# Altium PCB Copy of PCB1.PcbDoc
Units mil, origin at the board's own origin, x right, y up, seen from the top; angles counter-clockwise.
Board outline 3946.22 x 3225 mil, 2 copper layers (Top Layer, Bottom Layer); 36 components, 42 nets, 162 pads, 10 vias.
Unrouted connection lines stored in the file: 1.
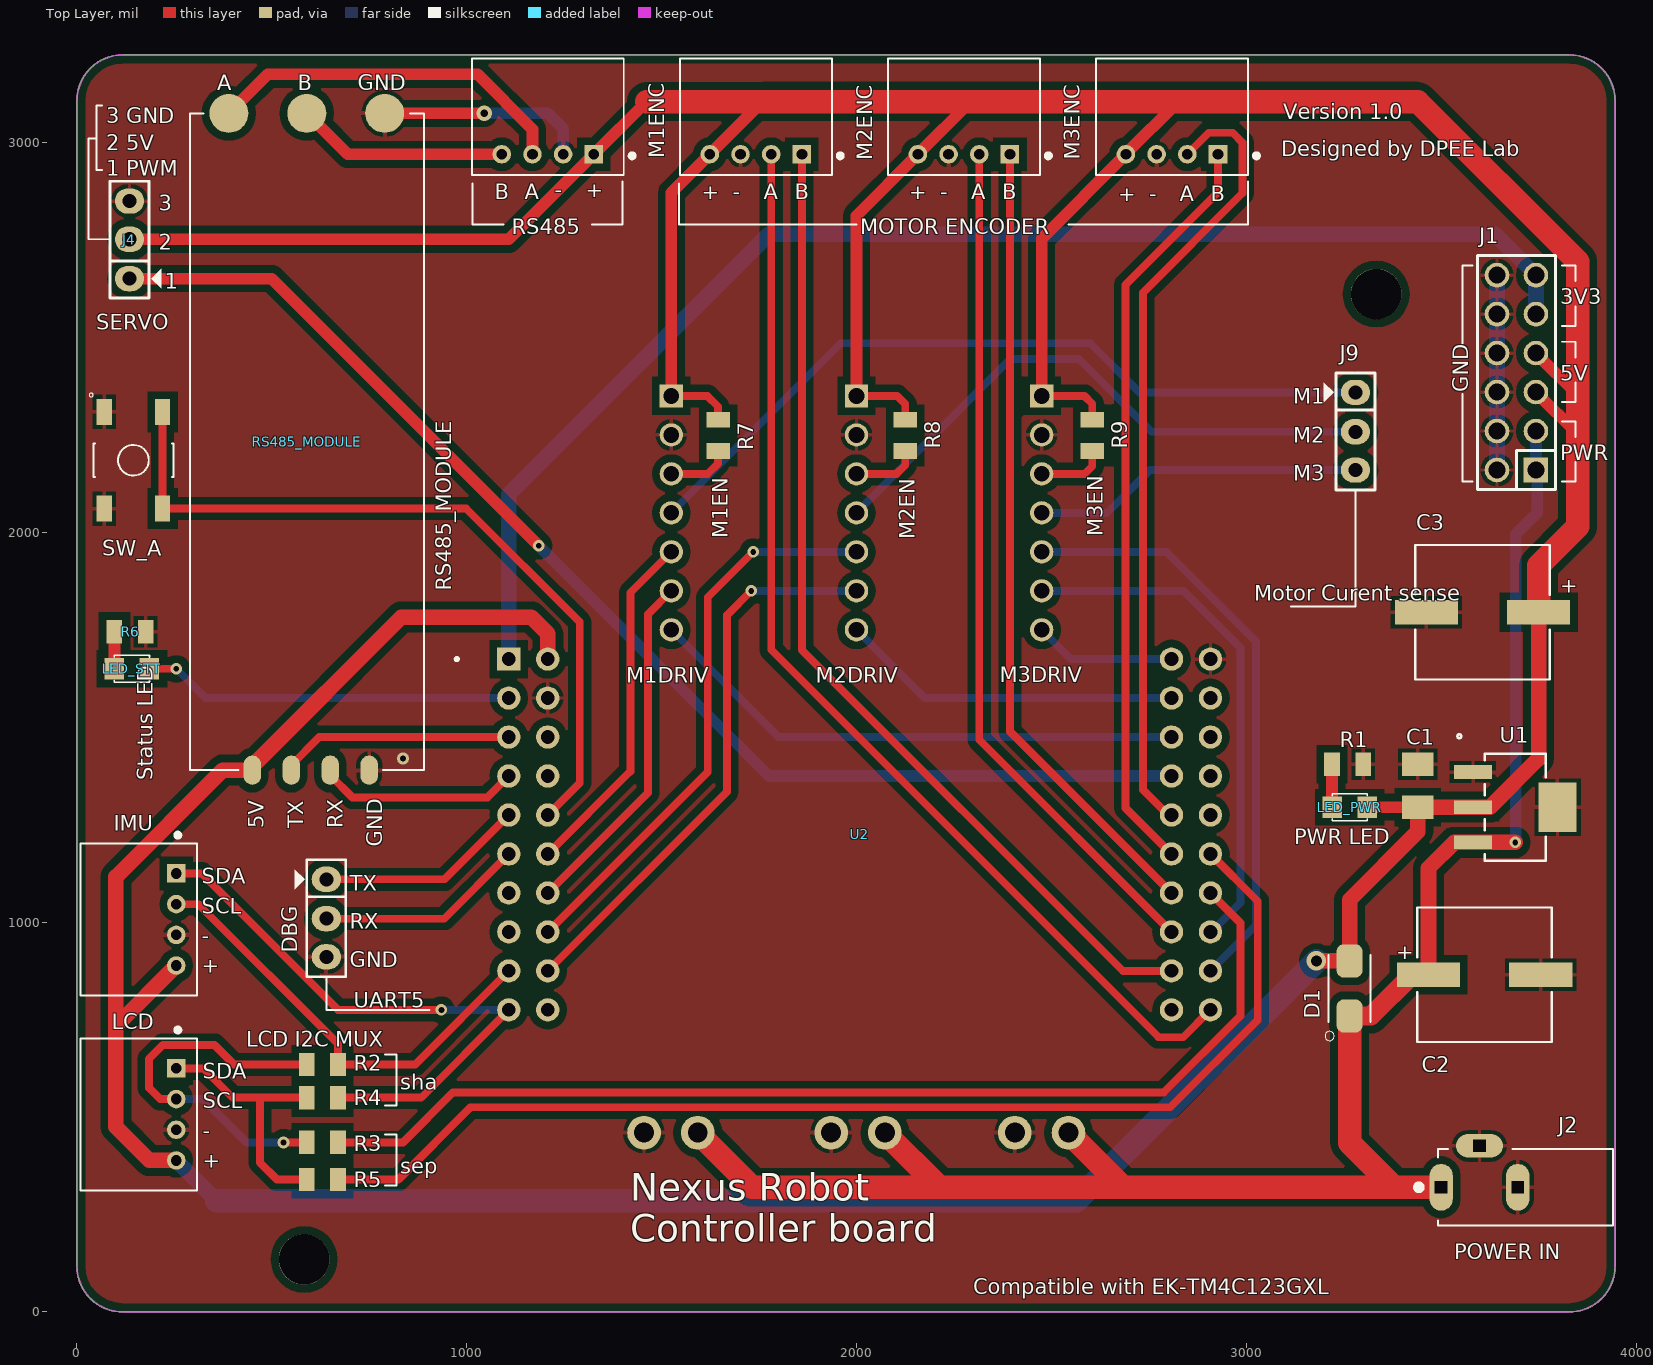
[diagram p0: Top Layer view]
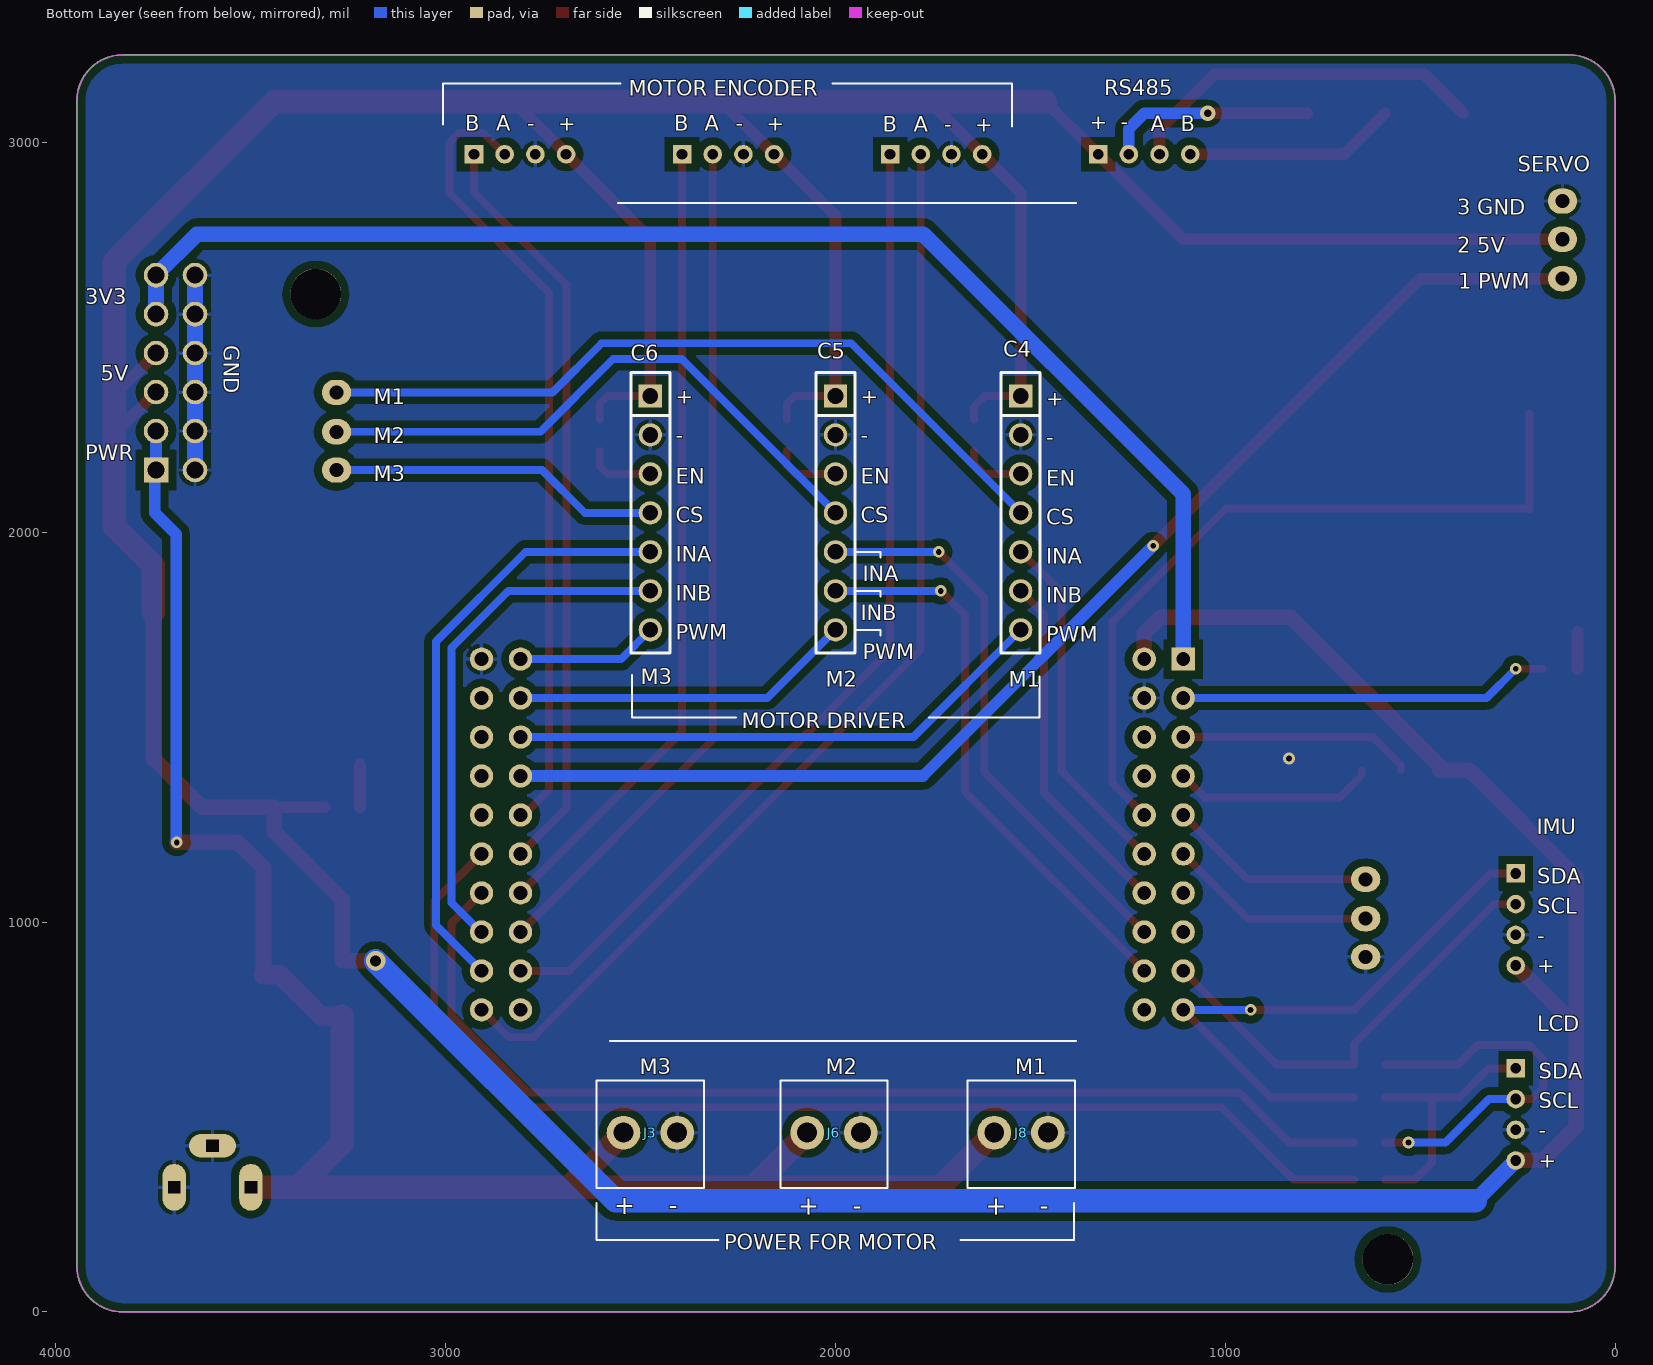
[diagram p1: Bottom Layer view, seen from below]

## Layer stack, top to bottom
Top Solder: solder mask 0.4, Solder Resist, Dk 3.5
Top Layer: signal copper 1.4
Dielectric 1: dielectric 12.6, FR-4, Dk 4.8
Bottom Layer: signal copper 1.4
Bottom Solder: solder mask 0.4, Solder Resist, Dk 3.5

## Board outline
118.11,0 cw(c118.11,118.11) 0,118.11 0,3106.89 cw(c118.11,3106.89) 118.11,3225 3828.11,3225 cw(c3828.11,3106.89) 3946.22,3106.89 3946.22,118.11 cw(c3828.11,118.11) 3828.11,0

## Design rules (kind name [scope] priority, off if disabled: settings)
Clearance Clearance_Poly [InPolygon] p1: gap=20 ignorepadtopadclearanceinfootprint=FALSE
Clearance [All] p2: gap=8 ignorepadtopadclearanceinfootprint=FALSE
ComponentClearance ComponentClearance_1 [InComponent('u2') vs InComponent('c*', 'j*','r*')] p1: gap=0 collisioncheckmode=3 verticalgap=0 showdistances=FALSE
ComponentClearance [All] p2: gap=10 collisioncheckmode=3 verticalgap=0 showdistances=FALSE
MinimumSolderMaskSliver [All] p1: minsoldermaskwidth=7
PolygonConnect [All] p1: connectstyle=Relief reliefconductorwidth=10 reliefentries=4 polygonreliefangle="90 Angle" airgapwidth=10
RoutingVias [All] p1: holewidth=28 width=50 viastyle="Through Hole" minholewidth=10 minwidth=20 maxholewidth=15 maxwidth=30
SilkToSilkClearance [All] p1: silktosilkclearance=5
SilkToSolderMaskClearance [IsPad] p1: minsilkscreentomaskgap=5 clearancetoexposedcopper=TRUE
SolderMaskExpansion [All] p1: expansion=4
Width [All] p1: maxlimit=60 minlimit=10 preferedwidth=20
26 further rules are at their usual default settings.

## Components (designator, comment, footprint, x,y, rotation, side; value= is the part's Value field where it differs from the comment)
C1 "0.1u" SMD-1206C 3440,1350 r180 top value=0.10µF
C2 "10u" CAP_EEFK_F_PAN-M 3611.5,865 r0 top
C3 "10u" CAP_EEFK_F_PAN-M 3606,1795 r180 top
C4 "JP7" JP7-C1T 1525,2350 r270 bottom locked
C5 "JP7" JP7-C1T 2000,2350 r270 bottom locked
C6 "JP7" JP7-C1T 2475,2350 r270 bottom locked
D1 "EGF1B" DIOM449X264X300L114X135N 3265,830 r90 top
DBG "Jumper 3" JP3 640,1010 r270 top value=J3
IMU "S4B-PH-K-S(LF)(SN)" JST_S4B-PH-K-S(LF)(SN) 255,1006.89 r270 top
J1 "JP6x2" JP6-D2T 3693.11,2410 r90 top
J2 "POWER IN" CUI_PJ-031C 3499.76,320 r0 top
J3 "M3" KF2-3.5 2475,460 r180 bottom locked
J4 "SERVO" JP3 135,2751 r90 top value=J3
J6 "M2" KF2-3.5 2003.9,460 r180 bottom locked
J8 "M1" KF2-3.5 1523.9,460 r180 bottom locked
J9 "Jumper 3" JP3 3280,2259 r270 top value=J3
LCD "S4B-PH-K-S(LF)(SN)" JST_S4B-PH-K-S(LF)(SN) 255,506.89 r270 top
LED_PWR "PWR LED" LED-0805-Green 3310,1295 r180 top value="LED 3 - 5 ly 2 Colour"
LED_STT "LED" LED-0805-Green 186.31,1650.26 r180 top value="LED 3 - 5 ly 2 Colour"
M1ENC "S4B-PH-K-S(LF)(SN)" JST_S4B-PH-K-S(LF)(SN) 1741.86,2970 r180 top
M2ENC "S4B-PH-K-S(LF)(SN)" JST_S4B-PH-K-S(LF)(SN) 2275.62,2970 r180 top
M3ENC "S4B-PH-K-S(LF)(SN)" JST_S4B-PH-K-S(LF)(SN) 2809.37,2970 r180 top
R1 "1k" SMD-0805-RES 3260,1405 r270 top value=0.2
R2 "0R" SMD-0805-RES 630,635 r90 top value=0.2
R3 "0R" SMD-0805-RES 630,435 r90 top value=0.2
R4 "0R" SMD-0805-RES 630,550 r90 top value=0.2
R5 "0R" SMD-0805-RES 630,340 r90 top value=0.2
R6 "1k" SMD-0805-RES 136.31,1745 r270 top value=0.2
R7 "1k" SMD-0805-RES 1645,2248.89 r0 top value=0.2
R8 "1k" SMD-0805-RES 2125,2248.89 r0 top value=0.2
R9 "1k" SMD-0805-RES 2605,2248.89 r0 top value=0.2
RS485 "S4B-PH-K-S(LF)(SN)" JST_S4B-PH-K-S(LF)(SN) 1208.11,2970 r180 top
RS485_MODULE "RS485_MODULE" RS485_MODULE 450,1389.96 r90 top
SW_A "TL3342F160QG" SW_TL3342F160QG 145,2185 r270 top
U1 "AMS1117" SOT_AMS_ADS 3690,1295 r270 top
U2 "EK-TM4C123GXL" MODULE_EK-TM4C123GXL 2008.11,1575 r0 top locked

## Footprints (in the part's own frame and the unit in brackets; to place one, negate y for a bottom-side part, rotate by r counter-clockwise, add the part's x,y. Pads: shape width x height; smd on the part's side, far side on the other; paste and mask are expansions set on the pad)
CAP_EEFK_F_PAN-M [mil]
  rect 162x63 smd paste+0 mask+0: 1(-144,0) 2(144,0)
  silkscreen extent -172,-172 172,172, body extent 0,0 10,10, height 10
CUI_PJ-031C [mil]
  oval 60x120 hole 31.5 square: 1(0,0) 2(196.85,0)
  oval 120x60 hole 31.5 square: 3(98.43,106.3)
  silkscreen extent -65,-98 441,98, body extent -13,-103 443,110, height 291
DIOM449X264X300L114X135N [mm]
  rrect54% 2.17x1.69 smd: A(1.795,0) C(-1.795,0)
  silkscreen extent -3.4,-1.36 2.19,1.6, body extent -2.6,-1.36 2.6,1.36, height 2.65
JP3 [mil] "Jumper 3"
  oval 65x75 hole 36: 1(-100,0) 2(1,0) 3(99,0)
  silkscreen extent -150,-81 150,50, body extent -150,-60 150,55, height 355
JP6-D2T [mm] "12 pins, dual pin, straight, gold plating"
  rect 1.6x1.6 hole 1.1: 1(-6.35,-1.27)
  round 1.6 hole 1.1: 2(-3.81,-1.27) 3(-1.27,-1.27) 4(1.27,-1.27) 5(3.81,-1.27) 6(6.35,-1.27) 7(6.35,1.27) 8(3.81,1.27) 9(1.27,1.27) 10(-1.27,1.27) 11(-3.81,1.27) 12(-6.35,1.27)
  silkscreen extent -7.62,-2.54 7.62,2.54, body extent -7.62,-2.54 7.62,2.54, height 8.55
JP7-C1T [mm] "7 row, straight, gold plating"
  rect 1.52x1.52 hole 1.02: 1(0,0)
  round 1.52 hole 1.02: 2(2.54,0) 3(5.08,0) 4(7.62,0) 5(10.16,0) 6(12.7,0) 7(15.24,0)
  silkscreen extent -1.52,-1.27 16.76,1.27, body extent -1.52,-1.25 16.76,1.25, height 8.51
JST_S4B-PH-K-S(LF)(SN) [mm]
  rect 1.208x1.208 hole 0.7: 1(-3,0)
  round 1.208 hole 0.7: 2(-1,0) 3(1,0) 4(3,0)
  silkscreen extent -5.64,-6.25 4.95,1.35, body extent -4.95,-6.22 4.95,1.38, height 4.8
KF2-3.5 [mm] "3,50mm - modular - blue - Horizontal wire entry - Pressure clamp - 8,4mm height - 02p"
  round 2.2 hole 1.3: 1(-1.75,0) 2(1.75,0)
  silkscreen extent -3.5,-3.6 3.5,3.4, body extent -3.95,-3.6 4.05,3.4, height 8.41
LED-0805-Green [mil]
  rect 50x55 smd: 1(0,0) 2(90,0)
  silkscreen extent 0,-35 90,35, body extent 5,-25 85,25, height 43
MODULE_EK-TM4C123GXL [mm]
  rect 1.52x1.52 hole 0.89: J1_1(-22.86,2.54)
  round 1.52 hole 0.89: J1_2(-22.86,0) J1_3(-22.86,-2.54) J1_4(-22.86,-5.08) J1_5(-22.86,-7.62) J1_6(-22.86,-10.16) J1_7(-22.86,-12.7) J1_8(-22.86,-15.24) J1_9(-22.86,-17.78) J1_10(-22.86,-20.32) J2_1(22.86,2.54) J2_2(22.86,0) J2_3(22.86,-2.54) J2_4(22.86,-5.08) J2_5(22.86,-7.62) J2_6(22.86,-10.16) J2_7(22.86,-12.7) J2_8(22.86,-15.24) J2_9(22.86,-17.78) J2_10(22.86,-20.32) J3_1(-20.32,2.54) J3_2(-20.32,0) J3_3(-20.32,-2.54) J3_4(-20.32,-5.08) J3_5(-20.32,-7.62) J3_6(-20.32,-10.16) J3_7(-20.32,-12.7) J3_8(-20.32,-15.24) J3_9(-20.32,-17.78) J3_10(-20.32,-20.32) J4_1(20.32,2.54) J4_2(20.32,0) J4_3(20.32,-2.54) J4_4(20.32,-5.08) J4_5(20.32,-7.62) J4_6(20.32,-10.16) J4_7(20.32,-12.7) J4_8(20.32,-15.24) J4_9(20.32,-17.78) J4_10(20.32,-20.32)
  silkscreen extent -26.35,2.44 -26.15,2.64
RS485_MODULE [mm]
  oval 1.905x1.143 smd: 1(0,0) 2(0,-2.54) 3(0,-5.08) 4(0,-7.62)
  round 2.54 smd: 5(42.8,1.53) 6(42.8,-3.55) 7(42.8,-8.63)
  silkscreen extent 0,-11.18 42.8,4.05, body extent 0,-11.18 42.8,4.06, height 1.4
SMD-0805-RES [mil]
  rect 60x40 smd: 1(0,40) 2(0,-40)
  body extent -24,-39 26,39, height 31
SMD-1206C [mil]
  rect 80x60 smd: 1(0,55) 2(0,-55)
  body extent -31,-63 32,63, height 39
SOT_AMS_ADS [mil]
  rect 35x98 smd paste+0 mask+0: 1(-90.16,-108.5) 2(0,-108.5) 3(90.16,-108.5)
  rect 126x98 smd paste+0 mask+0: 4(0,108.5)
  silkscreen extent -187,-148 137,78, body extent -132,-143 132,144, height 71
SW_TL3342F160QG [mm]
  rect 1.7x1 smd: 1(-3.15,-1.9) 2(3.15,-1.9) 3(-3.15,1.9) 4(3.15,1.9)
  silkscreen extent -4.38,-2.88 1.1,2.6, body extent -3.3,-2.5 3.3,2.5, height 1.46

## Part data
C1: library part "Cap SMD 1206", "CAP SMD 1206", Digi-Key Part Number=490-4495-1-ND, Manufacturer="Murata Electronics North America", Operating Temperature="-55°C ~ 125°C", Package / Case="1206 (3216 Metric)", Part Number=LLM315R71C104MA11L, Ratings=-, Temperature Coefficient=X7R, Tolerance=±20%, Voltage=16V, @ qty=0, Applications="Bypass, Decoupling", Datasheets=http://www.murata.com/~/media/webrenewal/support/library/catalog/products/capacitor/mlcc/c02e.pdf, Factory Stock=0, Features="Low ESL (Multi-Terminal)", Height - Seated (Max)=-, Image=//media.digikey.com/Renders/Murata%20Renders/1206(LLM315).jpg, Lead Spacing=-, Lead Style=-, Minimum Quantity=1, Mounting Type="Surface Mount, MLCC", Packaging="Cut Tape (CT)", Part Status=Active, Quantity Available=2915, Series=LLM, Size / Dimension="0.126\" L x 0.063\" W (3.20mm x 1.60mm)", Thickness (Max)="0.022\" (0.55mm)", Unit Price (USD)=0.9
C2 C3: library part CAP_ALU_8mm, "No Description Available", Manufacturer_Part_Number=EEEFP1H101AP, Built_By=EMA_UL_Team, Copyright="Copyright (C) 2018 Accelerated Designs. All rights reserved", RefDes=RefDes, SourceLibrary=Panasonic_2012-04-02a, Type=DEV, Vendor=Panasonic
C4 C5 C6: library part JP7_1, "WR-PHD 2.54 mm Angled Socket Header", Manufacturer="W¨¹rth Elektronik eiSos GmbH", partNo=613007143121, ComponentLink1 Description=Manufacturer, ComponentLink1URL=http://www.we-online.com, ComponentLink2 Description=Datasheet, ComponentLink2URL=http://katalog.we-online.de/em/datasheet/6130xx143121.pdf, Created by="Karrer Zheng", Created Date="29 March 2013", NoPins=07
D1: "SS54 SMA / Diode Shotky SS54 1N5824 5A 40V", Package="DO-214AC-214 ON Semiconductor", Availability=Unavailable, MF="ON Semiconductor", MP=EGF1B, Price=None, SnapEDA_Link=https://www.snapeda.com/parts/EGF1B/ON%20Semiconductor/view-part/1790489/?ref=snap
DBG J4 J9: library part JP3
IMU LCD M1ENC M2ENC M3ENC RS485: "Connector Header Through Hole, Right Angle 4 position 0.079 _2.00mm_", Package=None, Availability=Unavailable, MF="JST Sales", MP=S4B-PH-K-S_LF__SN_, Price=None, SnapEDA_Link=https://www.snapeda.com/parts/S4B-PH-K-S%28LF%29%28SN%29/JST%20Sales%20America%20Inc./view-part/591324/?ref=snap
J1: "WR-PHD 2.54 mm Dual Socket Header", Manufacturer="W¨¹rth Elektronik eiSos GmbH", partNo=61301221821, ComponentLink1 Description=Manufacturer, ComponentLink1URL=http://www.we-online.com, ComponentLink2 Description=Datasheet, ComponentLink2URL=http://katalog.we-online.de/em/datasheet/6130xx21821.pdf, Created by="Karrer Zheng", Created Date="29 March 2013", NoPins=12
J2: library part PJ-031C, "1.0 x 4.2 mm, 2.0 A, Horizontal, Through Hole, Dc Power Jack Connector", Package=None, Availability=Unavailable, MF="CUI Devices", MP=PJ-031C, Price=None, SnapEDA_Link=https://www.snapeda.com/parts/PJ-031C/CUI%20Devices/view-part/699414/?ref=snap
J3 J6 J8: library part KF2, Manufacturer="Würth Elektronik eiSos GmbH", partNo=691103110002, ComponentLink1 Description=Manufacturer, ComponentLink1URL=http://www.we-online.com, ComponentLink2 Description=Datasheet, ComponentLink2URL=http://katalog.we-online.de/em/datasheet/6911031100xx.pdf, Created by="Karrer Zheng", Created Date="29 October 2013", NoPins=2
LED_PWR LED_STT: library part "LED SMD"
R1 R2 R3 R4 R5 R6 R7 R8 R9: library part "Res SMD 0805", "RES SMD 0805", Digi-Key Part Number=P.2BKCT-ND, Manufacturer="Panasonic Electronic Components", Operating Temperature="-55°C ~ 155°C", Package / Case="0805 (2012 Metric)", Part Number=ERJ-S6SJR20V, Power (Watts)="0.25W, 1/4W", Supplier Device Package=0805, Temperature Coefficient=±150ppm/°C, Tolerance=±5%, @ qty=1500, Composition="Thick Film", Datasheets=https://industrial.panasonic.com/cdbs/www-data/pdf/RDA0000/AOA0000CE5.pdf, Factory Stock=0, Failure Rate=-, Features="Anti-Sulfur, Automotive AEC-Q200", Height - Seated (Max)="0.026\" (0.65mm)", Image=//media.digikey.com/Renders/Panasonic%20Renders/ERJ-0805%20Pkg.jpg, Minimum Quantity=1, Number of Terminations=2, Packaging="Cut Tape (CT)", Part Status=Active, Quantity Available=14281, Series=ERJ, Size / Dimension="0.079\" L x 0.049\" W (2.00mm x 1.25mm)", Unit Price (USD)=0.07603
SW_A: "Tactile Switch SPST-NO Top Actuated Surface Mount", Package=None, Availability=Unavailable, MF=E-Switch, MP=TL3342F160QG, Price=None, SnapEDA_Link=https://www.snapeda.com/parts/TL3342F160QG/E-Switch/view-part/1099729/?ref=snap
U1: "No Description Available", Built_By=EMA_Matt, Copyright="Copyright (C) 2018 Accelerated Designs. All rights reserved", Manufacturer_Part_Number=AMS1117, RefDes=RefDes, SourceLibrary=Advanced_Monolithic_Systems_10-16-2019, Type=DEV, Vendor="Advanced Monolithic Systems"
U2: "ARM® Cortex®-M4F Based MCU TM4C123G LaunchPad™ Evaluation Kit", Package=None, Availability=Warning, Check_prices=https://www.snapeda.com/parts/EK-TM4C123GXL/Texas%20Instruments/view-part/132968/?ref=eda, MF="Texas Instruments", MP=EK-TM4C123GXL, Price=None, Purchase-URL=https://pricing.snapeda.com/search/part/EK-TM4C123GXL/?ref=eda, SnapEDA_Link=https://www.snapeda.com/parts/EK-TM4C123GXL/Texas%20Instruments/view-part/132968/?ref=snap

## Free pads (board coordinates)
  round 130 hole 130 unplated: 8(583.11,135) 9(3333.35,2611.3)

## Via types
v1: diameter 30, hole 15, Top Layer to Bottom Layer, 8 vias
v2: diameter 50, hole 28, Top Layer to Bottom Layer, 1 vias
v3: diameter 40, hole 20, Top Layer to Bottom Layer, 1 vias

## Nets (pads, with @x,y where several pads share a name; then routed paths per layer and width w, separated by ;. In a path a pad name is that pad's centre, name@x,y a point inside that pad or via, vN(x,y) a via of type N, cw(c..) or ccw(c..) an arc to the next point about the centre after c; other vN are vias at no path point)
3V3: J1.5 J1.6 U2.J1_1 | length 3477.8
  Bottom Layer w40: U2.J1_1 1108.11,2098.11 1775,2765 3638.11,2765 J1.6 J1.5
5V: C1.1 C3.1 C4.1 C5.1 C6.1 D1.A IMU.4 J1.3 J1.4 J4.2 LCD.4 LED_PWR.1 M1ENC.4 M2ENC.4 M3ENC.4 R7.1 R8.1 R9.1 RS485.1 RS485_MODULE.1 U1.2 U2.J3_1 | length 15586
  Top Layer w20: C4.1 1617.44,2350 1645,2322.44 R7.1 ; C5.1 2104.23,2350 2125,2329.23 R8.1 ; C6.1 2585,2350 2605,2330 R9.1
  Top Layer w30: J4.2 1108.22,2752 RS485.1 1461.22,3105 ; C4.1 1525,2871.25 1758.75,3105 ; C5.1 2000,2812.49 M2ENC.4 2292.51,3105 ; C6.1 2475,2753.74 M3ENC.4 2691.26,2971.26 2825,3105 ; LED_PWR.1 C1.1 ; J1.3 3850,2253.11 ; J1.4 3848.11,2355 3850,2355
  Top Layer w40: LCD.4 186.22,388.78 100,475 100,733.78 ; IMU.4 100,733.78 ; U2.J3_1 1208.11,1740.39 1165.75,1782.75 832.75,1782.75 450,1400 RS485_MODULE.1 373.72,1389.96 100,1116.24 100,733.78 ; v2(3180,900.67) D1.A 3265,1057.25 3440,1232.25 C1.1 U1.2 3625,1295 3750,1420 C3.1
  Top Layer w60: 1461.22,3105 1758.75,3105 2255,3105 2292.51,3105 2327.51,3105 2825,3105 3440,3105 3850,2695 3850,2355 3850,2253.11 3850,2015 3750,1915 C3.1
  Bottom Layer w40: LCD.4 358.78,285
  Bottom Layer w60: 358.78,285 2564.33,285 v2(3180,900.67)
DBG_RX: DBG.1 U2.J1_5 | length 536.5
  Top Layer w20: DBG.1 943.11,1110 U2.J1_5
DBG_TX: DBG.2 U2.J1_6 | length 536.9
  Top Layer w20: DBG.2 942.11,1009 U2.J1_6
GND: C1.2 C2.2 C3.2 C4.2 C5.2 C6.2 DBG.3 IMU.3 J1.7 J1.8 J1.9 J1.10 J1.11 J1.12 J2.2 J2.3 J3.2 J4.3 J6.2 J8.2 LCD.3 M1ENC.3 M2ENC.3 M3ENC.3 R1.1 R6.1 RS485.2 RS485_MODULE.4 RS485_MODULE.7 SW_A.1 SW_A.2 U1.1 U1.4 U2.J2_1 U2.J3_2 | length 1039.3
  Top Layer w30: RS485_MODULE.7 v3(1045,3075)
  Bottom Layer w30: v3(1045,3075) 1207.48,3075 1247.48,3035 RS485.2
  Bottom Layer w40: J1.12 J1.11 J1.10 J1.9 J1.8 J1.7
  other v1: 836.67,1420
IMU_SCL: IMU.2 R2.2 U2.J1_9 | length 1145.1
  Top Layer w20: IMU.2 311.67,1046.26 670,687.93 R2.2@670,643.74 ; R2.2 868.11,635 U2.J1_9
IMU_SDA: IMU.1 R4.2 U2.J1_10 | length 1538.9
  Top Layer w20: IMU.1 320,1125 670,775 v1(935,775) ; R4.2 883.11,550 U2.J1_10@1104.76,771.65 ; U2.J1_10@1101.41,775 U2.J1_10@1104.76,771.65 ; U2.J1_10@1108.11,768.3 U2.J1_10@1104.76,771.65 ; U2.J1_10 U2.J1_10@1104.76,771.65
  Bottom Layer w20: v1(935,775) U2.J1_10
LCD_SCL: LCD.2 R2.1 R3.1 | length 977.8
  Top Layer w20: LCD.2 213.74,546.26 185,575 185,649.4 220.6,685 353.1,685 403.1,635 R2.1 ; v1(530,435) R3.1
  Bottom Layer w20: LCD.2 323.74,546.26 435,435 v1(530,435)
LCD_SCL_MUX: R3.2 U2.J2_7 | length 2796.5
  Top Layer w20: R3.2 836.67,435 965,563.33 2788.33,563.33 2985,760 2985,998.11 U2.J2_7
LCD_SDA: LCD.1 R4.1 R5.1 | length 670.7
  Top Layer w20: LCD.1 325,625 400,550 470,550 ; R5.1 513.25,340 470,383.25 470,550 ; R4.1 470,550
LCD_SDA_MUX: R5.2 U2.J2_6 | length 3004.6
  Top Layer w20: R5.2 825,340 1010,525 2805,525 3029.16,749.16 3029.16,1053.95 U2.J2_6
LED_STT: LED_STT.1 U2.J1_2 | length 953
  Top Layer w20: LED_STT.1 186.57,1650 v1(255,1650)
  Bottom Layer w20: v1(255,1650) 330,1575 U2.J1_2
M1_CS: C4.4 J9.1 | length 1987.4
  Bottom Layer w20: C4.4 1960,2485 2600,2485 2726,2359 J9.1
M1_EN: C4.3 R7.2 | length 163.4
  Top Layer w20: C4.3 1618.47,2150 1645,2176.53 R7.2
M1_ENC_A: M1ENC.2 U2.J2_10 | length 2838.7
  Top Layer w20: M1ENC.2 1781.23,1698.77 2775,705 2838.11,705 U2.J2_10
M1_ENC_B: M1ENC.1 U2.J4_9 | length 2560.8
  Top Layer w20: M1ENC.1 1859.97,1698.39 2683.36,875 U2.J4_9
M1_INA: C4.5 U2.J3_6 | length 906.3
  Top Layer w20: U2.J3_6 1420,1386.89 1420,1845 C4.5
M1_INB: C4.6 U2.J3_7 | length 906.3
  Top Layer w20: U2.J3_7 1465,1331.89 1465,1790 C4.6
M1_PWM: C4.7 U2.J4_3 | length 1397
  Bottom Layer w20: C4.7 1800,1475 U2.J4_3
M2_CS: C5.4 J9.2 | length 1521.1
  Bottom Layer w20: C5.4 2395,2445 2570,2445 2757,2258 J9.2
M2_EN: C5.3 R8.2 | length 170.9
  Top Layer w20: C5.3 2102.76,2150 2125,2172.24 R8.2
M2_ENC_A: M2ENC.2 U2.J4_8 | length 2199.3
  Top Layer w20: M2ENC.2 2314.99,2915.01 2314.99,1468.12 U2.J4_8
M2_ENC_B: M2ENC.1 U2.J4_7 | length 2072.3
  Top Layer w20: M2ENC.1@2380,2970 2393.73,2956.27 2393.73,1489.38 U2.J4_7
M2_INA: C5.5 U2.J3_8 | length 1458.2
  Top Layer w20: U2.J3_8 1618.47,1385.36 1618.47,1833.47 v1(1735,1950)
  Bottom Layer w20: v1(1735,1950) C5.5
M2_INB: C5.6 U2.J3_9 | length 1461.2
  Top Layer w20: U2.J3_9 1667.71,1334.6 1667.71,1787.71 v1(1730,1850)
  Bottom Layer w20: v1(1730,1850) C5.6
M2_PWM: C5.7 U2.J4_2 | length 880.6
  Bottom Layer w20: C5.7 2175,1575 U2.J4_2
M3_CS: C6.4 J9.3 | length 850.6
  Bottom Layer w20: C6.4 2642.96,2050 2752.96,2160 J9.3
M3_EN: C6.3 R9.2 | length 177.3
  Top Layer w20: C6.3 2585.26,2150 2605,2169.74 R9.2
M3_ENC_A: M3ENC.2 U2.J4_5 | length 2040.1
  Top Layer w20: U2.J4_5 2800,1275 2735,1340 2735,2615 2990,2870 2990,3000 2965,3025 2903.74,3025 M3ENC.2
M3_ENC_B: M3ENC.1 U2.J4_6 | length 1942.3
  Top Layer w20: U2.J4_6 2690,1293.11 2690,2635 2927.48,2872.48 M3ENC.1
M3_INA: C6.5 U2.J2_9 | length 1538.7
  Bottom Layer w20: C6.5 2795,1950 3025,1720 3025,991.89 U2.J2_9
M3_INB: C6.6 U2.J2_8 | length 1332.4
  Bottom Layer w20: C6.6 2838.89,1850 2985,1703.89 2985,1050 2910,975 U2.J2_8
M3_PWM: C6.7 U2.J4_1 | length 364.2
  Bottom Layer w20: C6.7 2550,1675 U2.J4_1
NetLED_PWR_2: LED_PWR.2 R1.2 | length 110
  Top Layer w30: LED_PWR.2 R1.2
NetLED_STT_2: LED_STT.2 R6.2 | length 94.7
  Top Layer w30: LED_STT.2 R6.2
RS485_A: RS485.3 RS485_MODULE.5 | length 942.9
  Top Layer w30: RS485_MODULE.5@389.88,3074.88 490,3175 1028.11,3175 1168.74,3034.37 RS485.3
RS485_B: RS485.4 RS485_MODULE.6 | length 543.7
  Top Layer w30: RS485_MODULE.6@589.88,3075.12 695,2970 RS485.4
RS485_RX: RS485_MODULE.3 U2.J1_4 | length 517.5
  Top Layer w20: RS485_MODULE.3 650,1376.91 706.91,1320 1053.11,1320 U2.J1_4
RS485_TX: RS485_MODULE.2 U2.J1_3 | length 601
  Top Layer w20: RS485_MODULE.2 550,1403.01 621.99,1475 U2.J1_3
SERVO_PWM: J4.1 U2.J4_4 | length 3201.6
  Top Layer w30: J4.1 499.63,2651 v1(1185,1965.63)
  Bottom Layer w30: v1(1185,1965.63) 1775.63,1375 U2.J4_4
SW_A: SW_A.3 SW_A.4 U2.J3_5 | length 1964.6
  Top Layer w20: SW_A.4@219.61,2060 SW_A.3@219.61,2305 ; SW_A.4 999.02,2060.98 1290,1770 1290,1356.89 U2.J3_5
VPOWER: C2.1 D1.C J1.1 J1.2 J2.1 J3.1 J6.1 J8.1 U1.3 | length 4696.3
  Top Layer w40: C2.1 3467.5,1138.89 3533.45,1204.84 U1.3 v1(3690,1204.84)
  Top Layer w50: D1.C 3319.33,759.33 3425,865 C2.1
  Top Layer w60: J8.1 1732.8,320 2212.8,320 ; J6.1 2212.8,320 ; J3.1 2683.9,320 ; D1.C 3265,433.78 3378.78,320 ; J2.1 3378.78,320 ; 2212.8,320 2683.9,320 ; 2683.9,320 3378.78,320
  Bottom Layer w30: v1@3691.61,1205.2 3691.61,1995.12 3746.49,2050 3746.49,2156.62 J1.1 J1.2
pads on no net: U2.J1_7 U2.J1_8 U2.J2_2 U2.J2_3 U2.J2_4 U2.J2_5 U2.J3_3 U2.J3_4 U2.J3_10 U2.J4_10

## Polygon pours and split planes (outlines as drawn)
GND on Bottom Layer "Bottom Layer-GND" (solid, pour order 2): 0,3225 3946.22,3225 3946.22,0 0,0 0,3225
GND on Top Layer "Top Layer-GND" (solid, pour order 0): 0,3225 3946.22,3225 3946.22,0 0,0 0,3225

## Keep-outs
Keep-Out Layer:
  the board outline again, w5

## Silkscreen, mask and mechanical layers (free items; w line width, h text height)
Top Overlay:
  lines w5: 50,3010 30,3010 30,2752 85,2752 ; 65,2930 50,2930 50,3095 65,3095 ; 640,860 640,775 905,775 ; 790,325 820,325 820,455 790,455 ; 790,530 820,530 820,660 790,660 ; 1015,2895 1015,2790 1095,2790 ; 1321.78,2790 1400,2790 ; 1399.25,2790.75 1399.25,2900 ; 1545,2895 1545,2790 2000,2790 ; 2543.9,2790 3005,2790 ; 3004.25,2790.75 3004.25,2900 ; 3004.25,2825.75 3005,2825 ; 3115,1810 3280,1810 3280,2109 ; 3555,2355 3555,2130 3580,2130 ; 3555,2485 3555,2685 3580,2685 ; 3810,2130 3845,2130 3845,2180 ; 3810,2285 3845,2285 3845,2245 ; 3810,2334 3845,2334 3845,2384 ; 3810,2489 3845,2489 3845,2449 ; 3810,2530 3845,2530 3845,2580 ; 3810,2685 3845,2685 3845,2645
  text "A" at 360,3133.73 h39.37
  text "B" at 566.99,3133.73 h39.37
  text "GND" at 720,3133.73 h39.37
  text "Version 1.0" at 3095,3060 h39.37
  text "3 GND" at 75,3050 h39.37
  text "2 5V" at 75,2980 h39.37
  text "Designed by DPEE Lab" at 3090,2965 h39.37
  text "1 PWM" at 75,2915 h39.37
  text "-" at 1226.3,2860 h39.37
  text "+" at 1305,2860 h39.37
  text "B" at 1072.08,2855 h39.37
  text "A" at 1148.68,2855 h39.37
  text "+" at 1603.69,2855 h39.37
  text "-" at 1683.04,2855 h39.37
  text "A" at 1762.4,2855 h39.37
  text "B" at 1841.75,2855 h39.37
  text "+" at 2135.95,2855 h39.37
  text "-" at 2215.3,2855 h39.37
  text "A" at 2294.65,2855 h39.37
  text "B" at 2374,2855 h39.37
  text "+" at 2671.17,2850 h39.37
  text "-" at 2750.52,2850 h39.37
  text "A" at 2829.88,2850 h39.37
  text "B" at 2909.23,2850 h39.37
  text "3" at 210,2825 h39.37
  text "MOTOR ENCODER" at 2010,2765 h39.37
  text "2" at 210,2725 h39.37
  text "1" at 225,2625 h39.37
  text "3V3" at 3805,2585 h39.37
  text "5V" at 3805,2389 h39.37
  text "GND" at 3570,2359 h39.37 r90
  text "M1" at 3120,2330 h39.37
  text "M2" at 3120,2230 h39.37
  text "PWR" at 3805,2185 h39.37
  text "M3" at 3120,2132 h39.37
  text "M3EN" at 2631.22,1990 h39.37 r90
  text "M1EN" at 1670.33,1985 h39.37 r90
  text "M2EN" at 2150,1982.75 h39.37 r90
  text "+" at 3805,1845 h39.37
  text "Motor Curent sense" at 3020,1825 h39.37
  text "M3DRIV" at 2367.5,1615 h39.37
  text "M1DRIV" at 1410,1613.89 h39.37
  text "M2DRIV" at 1895,1613.89 h39.37
  text "Status LED" at 195,1364.74 h39.37 r90
  text "5V" at 480,1241.23 h39.37 r90
  text "TX" at 581.2,1241.23 h39.37 r90
  text "RX" at 682.39,1241.23 h39.37 r90
  text "GND" at 783.59,1194 h39.37 r90
  text "SDA" at 320,1098.16 h39.37
  text "TX" at 700,1080.22 h39.37
  text "SCL" at 320,1022.11 h39.37
  text "RX" at 700,982.61 h39.37
  text "-" at 320,946.05 h39.37
  text "+" at 3385,905 h39.37
  text "GND" at 700,885 h39.37
  text "+" at 320,870 h39.37
  text "UART5" at 710,780 h39.37
  text "LCD I2C MUX" at 435,680 h39.37
  text "SDA" at 322.78,598.16 h39.37
  text "sha" at 830,570 h39.37
  text "SCL" at 322.78,522.11 h39.37
  text "-" at 322.78,446.05 h39.37
  text "+" at 322.78,370 h39.37
  text "sep" at 830,355 h39.37
  text "Nexus Robot / Controller board" at 1420,180.22 h70
  text "Compatible with EK-TM4C123GXL" at 2300,45 h39.37
Bottom Overlay:
  lines w5: 1383.11,695 2578.11,695 ; 1383.11,2845 2558.11,2845 ; 1387.85,280 1387.85,185 1680,185 ; 1476.48,1629.89 1476.48,1524.89 1760,1524.89 ; 1546.76,3151.21 2007.86,3151.21 ; 1547.51,3041.21 1547.51,3150.46 ; 1885,1735 1885,1750 1950,1750 ; 1885,1835 1885,1850 1950,1850 ; 1885,1935 1885,1950 1950,1950 ; 2255,1524.76 2522.75,1524.76 ; 2300,185 2612.85,185 2612.85,280 ; 2522,1525.51 2522,1634.76 ; 2551.76,3151.21 3006.76,3151.21 3006.76,3046.21
  text "RS485" at 1310,3121.89 h39.37
  text "MOTOR ENCODER" at 2530,3120 h39.37
  text "-" at 1268.66,3033.99 h39.37
  text "+" at 1347.36,3033.99 h39.37
  text "+" at 2176.19,3030.27 h39.37
  text "-" at 2255.54,3030.27 h39.37
  text "A" at 2334.89,3030.27 h39.37
  text "B" at 2414.24,3030.27 h39.37
  text "+" at 2711.19,3030.01 h39.37
  text "-" at 2790.54,3030.01 h39.37
  text "A" at 2869.89,3030.01 h39.37
  text "B" at 2949.24,3030.01 h39.37
  text "B" at 1114.44,3028.99 h39.37
  text "A" at 1191.04,3028.99 h39.37
  text "+" at 1641.19,3027.89 h39.37
  text "-" at 1720.54,3027.89 h39.37
  text "A" at 1799.89,3027.89 h39.37
  text "B" at 1879.24,3027.89 h39.37
  text "SERVO" at 250,2925 h39.37
  text "3 GND" at 405,2815 h39.37
  text "2 5V" at 405,2717.41 h39.37
  text "1 PWM" at 402.7,2625 h39.37
  text "3V3" at 3925,2585 h39.37
  text "GND" at 3570,2480 h39.37 r90
  text "5V" at 3885,2389.6 h39.37
  text "+" at 1935,2330 h39.37
  text "+" at 2410,2330 h39.37
  text "M1" at 3185,2329 h39.37
  text "+" at 1460,2325 h39.37
  text "-" at 1935,2230 h39.37
  text "-" at 2410,2230 h39.37
  text "M2" at 3185,2229 h39.37
  text "-" at 1460,2225 h39.37
  text "PWR" at 3925,2184.46 h39.37
  text "M3" at 3185,2131 h39.37
  text "EN" at 1935,2125 h39.37
  text "EN" at 2410,2125 h39.37
  text "EN" at 1460,2120 h39.37
  text "CS" at 1935,2025 h39.37
  text "CS" at 2410,2025 h39.37
  text "CS" at 1460,2020 h39.37
  text "INA" at 2410,1925 h39.37
  text "INA" at 1460,1920 h39.37
  text "INA" at 1930,1875 h39.37
  text "INB" at 2410,1825 h39.37
  text "INB" at 1460,1820 h39.37
  text "INB" at 1935,1775 h39.37
  text "PWM" at 2410,1725 h39.37
  text "PWM" at 1460,1720 h39.37
  text "PWM" at 1930,1675 h39.37
  text "M3" at 2500,1610 h39.37
  text "M2" at 2025,1603.73 h39.37
  text "M1" at 1555,1603.47 h39.37
  text "MOTOR DRIVER" at 2240,1498.16 h39.37
  text "IMU" at 201.26,1225 h39.37
  text "SDA" at 200,1098.3 h39.37
  text "SCL" at 200,1022.25 h39.37
  text "-" at 200,946.2 h39.37
  text "+" at 200,870.15 h39.37
  text "LCD" at 200,720 h39.37
  text "SDA" at 195.31,598.56 h39.37
  text "SCL" at 195.31,522.51 h39.37
  text "-" at 195.31,446.46 h39.37
  text "+" at 195.31,370.41 h39.37
  text "-" at 2428.29,251 h47.24
  text "+" at 2567.2,251 h47.24
  text "-" at 1476.08,250 h47.24
  text "+" at 1615,250 h47.24
  text "-" at 1956.08,250 h47.24
  text "+" at 2095,250 h47.24
  text "POWER FOR MOTOR" at 2285,160 h39.37